# Altium PCB CamBoard.PcbDoc
Units mil, origin at the board's own origin, x right, y up, seen from the top; angles counter-clockwise.
Board outline 4547.44 x 2454.85 mil, 2 copper layers (Top Layer, Bottom Layer); 13 components, 15 nets, 97 pads, 23 vias.
Unrouted connection lines stored in the file: 2.
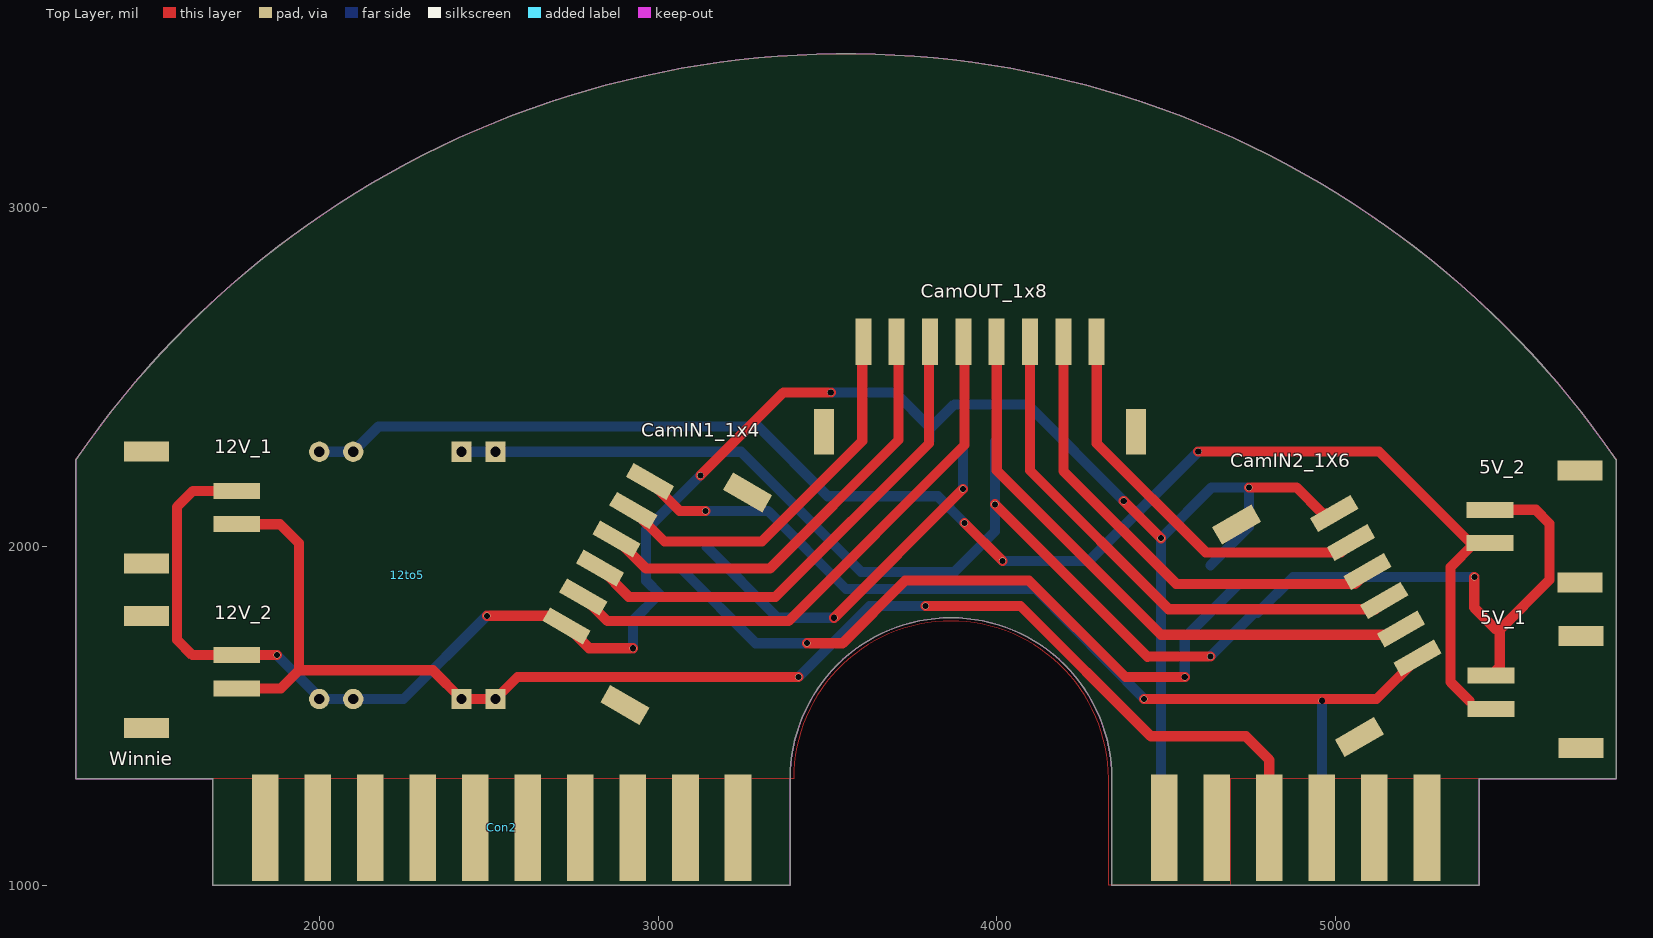
[diagram p0: Top Layer view]
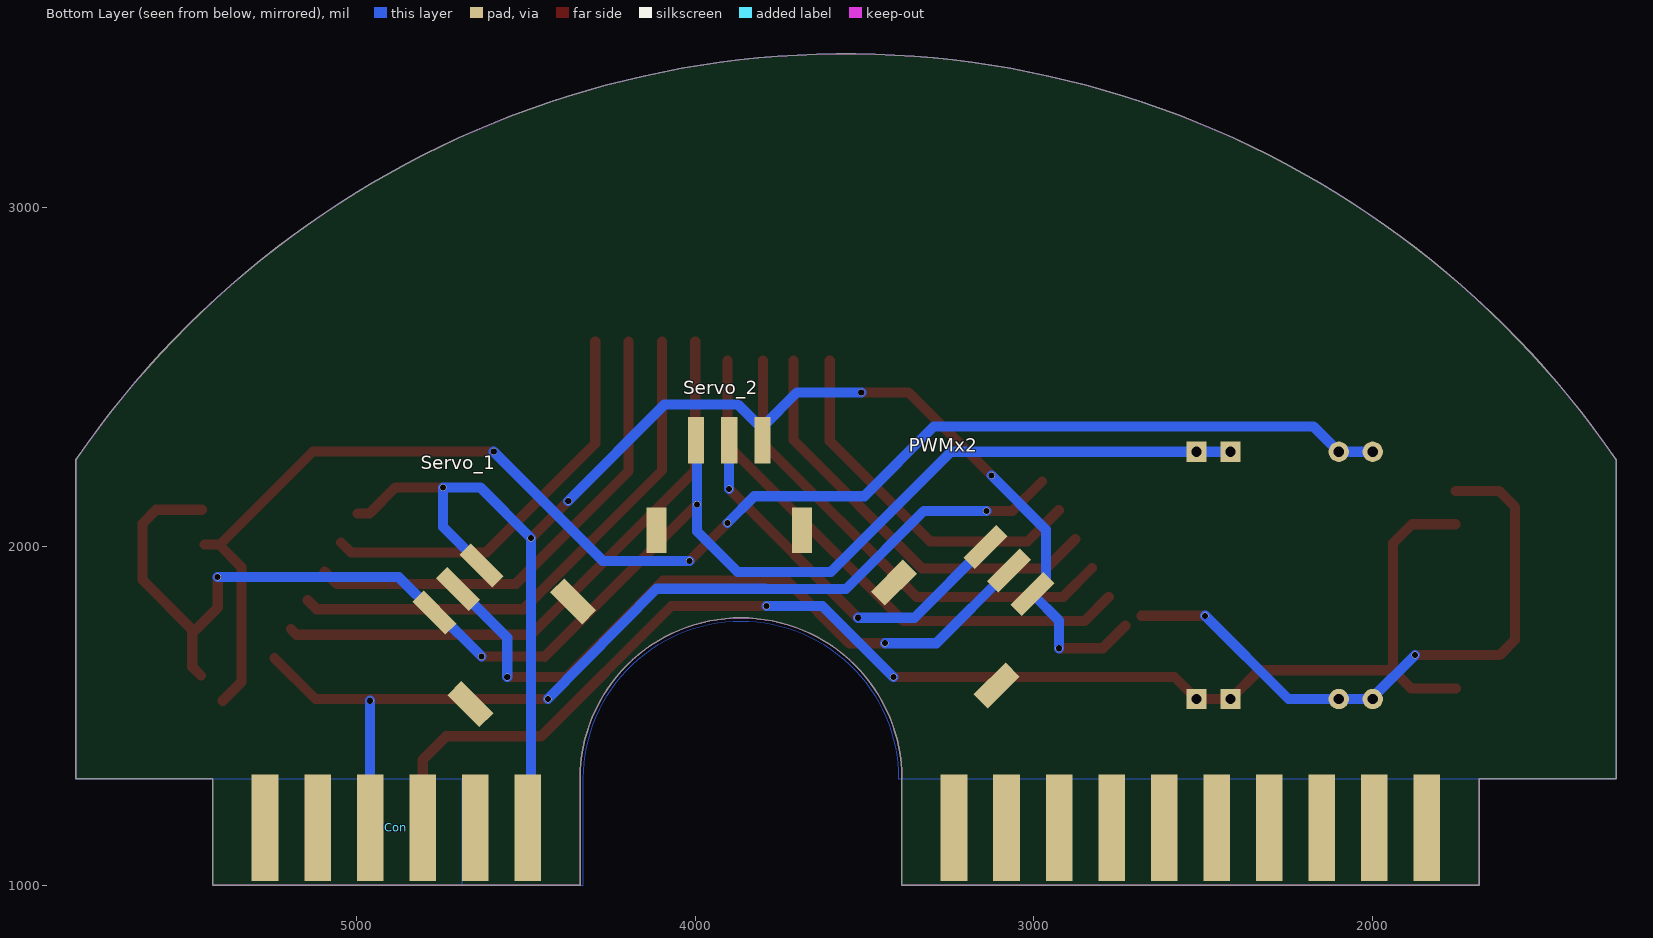
[diagram p1: Bottom Layer view, seen from below]

## Layer stack, top to bottom
Top Solder: solder mask 0.4, Solder Resist, Dk 3.5
Top Layer: signal copper 1.4
Dielectric 1: dielectric 12.6, FR-4, Dk 4.8
Bottom Layer: signal copper 1.4
Bottom Solder: solder mask 0.4, Solder Resist, Dk 3.5

## Board outline
1281.3,1315 1281.3,2256.37 1281.27,2256.39 cw(c3555,699.09) 5828.71,2256.42 5828.7,2256.41 5828.7,1315 5425,1315 5425,1000 4340,1000 4340,1315 ccw(c3865,1315) 3865,1790 ccw(c3865,1315) 3390,1315 3390,1000 1685,1000 1685,1315

## Design rules (kind name [scope] priority, off if disabled: settings)
Clearance [All] p1: gap=8 ignorepadtopadclearanceinfootprint=FALSE
PolygonConnect GND [InPadClass('GND')] p1: connectstyle=Direct reliefconductorwidth=10 reliefentries=4 polygonreliefangle="90 Angle" airgapwidth=10
PolygonConnect [All] p2: connectstyle=Relief reliefconductorwidth=10 reliefentries=4 polygonreliefangle="90 Angle" airgapwidth=10
RoutingVias [All] p1: holewidth=28 width=50 viastyle="Through Hole" minholewidth=28 minwidth=50 maxholewidth=28 maxwidth=50
SolderMaskExpansion [All] p1: expansion=4
Width [All] p1: maxlimit=100 minlimit=20 preferedwidth=30 minimp=50.000000 maximp=50.000000 favimp=50.000000
30 further rules are at their usual default settings.

## Components (designator, comment, footprint, x,y, rotation, side; value= is the part's Value field where it differs from the comment)
5V_1 "XHconnector_1x2" XH1x2 5537.99,1540.83 r270 top
5V_2 "XHconnector_1x2" XH1x2 5535,2030 r270 top
12to5 "VoltageConverter" converter 2260,1915 r90 top
12V_1 "XHconnector_1x2" XH1x2 1677.01,2144.88 r90 top
12V_2 "XHconnector_1x2" XH1x2 1677.01,1660 r90 top
CamIN1_1x4 "XHconnector_1x6" XH1x6 3005,2085 r240 top
CamIN2_1X6 "XHconnector_1x6" XH1x6 5135,1700 r120 top
CamOUT_1x8 "XHconnector_1x8" XH1x8 4216.54,2526.26 r180 top
Con "2x6pin" 2X6PIN 4882.32,1170 r180 bottom
Con2 "2x10pin" 2X10PIN 2538.03,1170 r0 top locked
PWMx2 "PWMx2" XH1x3 3115.57,1860.04 r45 bottom
Servo_1 "Servo" XH1x3 4630.81,1832.84 r315 bottom
Servo_2 "Servo" XH1x3 3880,2235 r0 bottom

## Footprints (in the part's own frame and the unit in brackets; to place one, negate y for a bottom-side part, rotate by r counter-clockwise, add the part's x,y. Pads: shape width x height; smd on the part's side, far side on the other; paste and mask are expansions set on the pad)
2X6PIN [mm]
  rect 2x8 smd far side: 1(-9.85,0) 2(-5.91,0) 3(-1.97,0) 4(1.97,0) 5(5.91,0) 6(9.85,0)
  rect 2x8 smd: 1(-9.85,0) 2(-5.91,0) 3(-1.97,0) 4(1.97,0) 5(5.91,0) 6(9.85,0)
2X10PIN [mm]
  rect 2x8 smd far side: 1(17.73,0) 3(13.79,0) 5(9.85,0) 7(5.91,0) 9(1.97,0) 11(-1.97,0) 13(-5.91,0) 15(-9.85,0) 17(-13.79,0) 19(-17.73,0)
  rect 2x8 smd: 2(17.73,0) 4(13.79,0) 6(9.85,0) 8(5.91,0) 10(1.97,0) 12(-1.97,0) 14(-5.91,0) 16(-9.85,0) 18(-13.79,0) 20(-17.73,0)
converter [mil]
  round 60 hole 30: 1(-365,260) 2(-365,160) 7(365,160) 8(365,260)
  rect 60x60 hole 30: 3(-365,-160) 4(-365,-260) 5(365,-260) 6(365,-160)
XH1x2 [mm]
  rect 1.2x3.5 smd: 1(-2,-2) 2(0.5,-2)
  rect 1.5x3.4 smd: 3(-4.95,4.75) 4(3.45,4.75)
XH1x3 [mm]
  rect 1.2x3.5 smd: 1(-2,-2) 2(0.5,-2) 3(3,-2)
  rect 1.5x3.4 smd: 4(-4.95,4.75) 5(5.95,4.75)
XH1x6 [mm]
  rect 1.2x3.5 smd: 1(-2,-2) 2(0.5,-2) 3(3,-2) 4(5.5,-2) 5(8,-2) 6(10.5,-2)
  rect 1.5x3.4 smd: 7(-4.95,4.75) 8(13.45,4.75)
XH1x8 [mm]
  rect 1.2x3.5 smd: 1(-2,-2) 2(0.5,-2) 3(3,-2) 4(5.5,-2) 5(8,-2) 6(10.5,-2) 7(13,-2) 8(15.5,-2)
  rect 1.5x3.4 smd: 9(-4.95,4.75) 10(18.45,4.75)

## Via types
v1: diameter 20, hole 18, Top Layer to Bottom Layer, tented both sides, 23 vias

## Nets (pads, with @x,y where several pads share a name; then routed paths per layer and width w, separated by ;. In a path a pad name is that pad's centre, name@x,y a point inside that pad or via, vN(x,y) a via of type N, cw(c..) or ccw(c..) an arc to the next point about the centre after c; other vN are vias at no path point)
5V: CamIN1_1x4.1 CamIN2_1X6.1 Con.3 | length 2966.9
  Top Layer w30: CamIN1_1x4.1 3063.74,2105 v1(3140,2105) ; v1(4435,1550) 4965,1550 5121.38,1550 CamIN2_1X6.1 ; Con.3@4959.76,1170 Con.3@4965,1175.24
  Bottom Layer w30: v1(3140,2105) 3325,2105 3554.94,1875.06 3793.8,1875.06 3794.31,1875.57 4114.43,1875.57 v1(4435,1550) ; Con.3@4959.88,1170 v1(4959.88,1544.88)
12V: 12to5.3 12to5.4 12V_1.1 12V_2.1 Con.4 | length 4193.5
  Top Layer w30: 12V_2.1@1753.74,1581.26 12V_2.1 1886.26,1581.26 1940,1635 ; 12V_1.1 1883.86,2066.14 1940,2010 1940,1635 ; v1(3415,1615) 2585,1615 12to5.4 12to5.3 2335,1635 1940,1635 ; v1(3790,1825) 4070,1825 4455,1440 4735,1440 4804.65,1370.35 Con.4@4804.65,1170
  Bottom Layer w30: v1(3415,1615) 3625,1825 v1(3790,1825)
GND: 12to5.1 12to5.2 12V_1.2 12V_2.2 CamIN1_1x4.6 CamIN2_1X6.6 Con.6 PWMx2.1 Servo_1.1 Servo_2.1 | length 6307.9
  Top Layer w30: 12V_1.2 1627.24,2164.57 1580,2117.32 1580,1725 1625.32,1679.68 12V_2.2 v1(1875,1679.68) ; v1(2495,1795.83) CamIN1_1x4.6@2682.31,1795.83 ; CamIN1_1x4.6 2796.48,1700 v1(2925.83,1700) ; v1(3125,2210) 3370,2455 v1(3510,2455) ; v1(4375,2135) v1(4485,2025) ; v1(4745,2175) 4885,2175 4962.63,2097.37 CamIN2_1X6.6
  Bottom Layer w30: v1(1875,1679.68) 12to5.1@2002.34,1552.34 ; 12to5.1 12to5.2 2248.35,1550 2494.17,1795.83 v1(2495,1795.83) ; v1(2925.83,1700) 2925.83,1781.65 PWMx2.1 2965,1899.25 2965,2050 v1(3125,2210) ; v1(3510,2455) 3700,2455 3801.26,2353.74 Servo_2.1@3801.26,2346.26 ; Servo_2.1 Servo_2.1@3801.26,2346.26 ; v1(4375,2135) 4090,2420 3875,2420 Servo_2.1@3801.26,2346.26 ; Con.6@4492.2,1182.2 Con.6@4499.41,1175 ; Con.6@4503.29,1070.11 4485,1088.39 v1(4485,2025) 4635,2175 v1(4745,2175) 4745,2058.39 Servo_1.1
NetPWMx2_2: PWMx2.2 Servo_1.2 | length 2100.2
  Top Layer w30: v1(3440,1715) 3545,1715 3730,1900 4095,1900 4380,1615 v1(4555,1615)
  Bottom Layer w30: PWMx2.2 3288.44,1715 v1(3440,1715) ; v1(4555,1615) 4555,1730.83 Servo_1.2@4710.26,1886.09
NetPWMx2_3: PWMx2.3 Servo_2.2 | length 1120.7
  Top Layer w30: v1(3520,1790) v1(3900,2170)
  Bottom Layer w30: PWMx2.3 3352.64,1790 v1(3520,1790) ; v1(3900,2170) Servo_2.2@3900,2290
S1: CamIN1_1x4.2 CamOUT_1x8.8 | length 1075.6
  Top Layer w30: CamIN1_1x4.2 3019.29,2015 3306.46,2015 3603.15,2311.69 CamOUT_1x8.8@3603.15,2550
S2: CamIN1_1x4.3 CamOUT_1x8.7 | length 1260.7
  Top Layer w30: CamIN1_1x4.3 2964.84,1935 3330,1935 3710,2315 CamOUT_1x8.7@3710,2550
S3: CamIN1_1x4.4 CamOUT_1x8.6 | length 1439.7
  Top Layer w30: CamIN1_1x4.4 2913.78,1851.61 3346.88,1851.61 3800,2304.72 CamOUT_1x8.6@3800,2550
S4: CamIN1_1x4.5 CamOUT_1x8.5 | length 1620.7
  Top Layer w30: CamIN1_1x4.5 2850.93,1780 3385,1780 3905,2300 CamOUT_1x8.5@3905,2550
S5: CamIN2_1X6.2 CamOUT_1x8.4 | length 1781
  Top Layer w30: CamOUT_1x8.4 4000,2225 4485,1740 5176.93,1740 CamIN2_1X6.2
S6: CamIN2_1X6.3 CamOUT_1x8.3 | length 1606.8
  Top Layer w30: CamOUT_1x8.3 4098.43,2224.64 4508.06,1815 5117.48,1815 CamIN2_1X6.3
S7: CamIN2_1X6.4 CamOUT_1x8.2 | length 1433.2
  Top Layer w30: CamOUT_1x8.2 4196.85,2223.15 4530,1890 5058.03,1890 CamIN2_1X6.4
S8: CamIN2_1X6.5 CamOUT_1x8.1 | length 1196
  Top Layer w30: CamOUT_1x8.1 4295.28,2304.72 4616.96,1983.04 5016.62,1983.04 CamIN2_1X6.5
VOUT+: 5V_1.1 5V_2.1 12to5.5 12to5.6 Servo_1.3 Servo_2.3 | length 4645.1
  Top Layer w30: v1(3995,2125) 4445,1675 4445.6,1675.6 v1(4630.81,1675.6) ; v1(5410,1910) 5410,1820 5475,1755 5485,1755 ; 5V_2.1 5591.26,2108.74 5632.08,2067.92 5632.08,1902.08 5485,1755 ; 5V_1.1 5485,1645.32 5485,1755
  Bottom Layer w30: 12to5.6 12to5.5 3245,2280 3600,1925 3875,1925 3995,2045 v1(3995,2125) 3995,2310.63 Servo_2.3 ; v1(4630.81,1675.6) 4760.2,1805 Servo_1.3 4875,1910 v1(5410,1910)
VOUT-: 5V_1.2 5V_2.2 12to5.7 12to5.8 | length 4403.6
  Top Layer w30: v1(3905,2070) v1(4016.94,1958.06) ; v1(4595,2280.71) 5128.64,2280.71 5403.21,2006.14 5V_2.2@5406.14,2006.14 ; 5395,1545 5340,1600 5340,1940 5V_2.2@5406.14,2006.14 ; 5V_2.2@5449.25,2006.14 5V_2.2@5406.14,2006.14
  Bottom Layer w30: 12to5.8 12to5.7 2175,2355 3295,2355 3501.27,2148.73 3826.27,2148.73 v1(3905,2070) ; v1(4016.94,1958.06) 4273.06,1958.06 v1@4595.35,2280.35
pads on no net: 5V_1.3 5V_1.4 5V_2.3 5V_2.4 12V_1.3 12V_1.4 12V_2.3 12V_2.4 CamIN1_1x4.7 CamIN1_1x4.8 CamIN2_1X6.7 CamIN2_1X6.8 CamOUT_1x8.9 CamOUT_1x8.10 Con2.1 Con2.2 Con2.3 Con2.4 Con2.5 Con2.6 Con2.7 Con2.8 Con2.9 Con2.10 Con2.11 Con2.12 Con2.13 Con2.14 Con2.15 Con2.16 Con2.17 Con2.18 Con2.19 Con2.20 Con.1 Con.2 Con.5 PWMx2.4 PWMx2.5 Servo_1.4 Servo_1.5 Servo_2.4 Servo_2.5

## Polygon pours and split planes (outlines as drawn)
GND on Top Layer "Top Layer-No Net" (solid, shelved, pour order 0): 1675,1315 1281.3,1315 1281.3,2256.37 cw(c3555.02,699.09) 5828.71,2256.42 5828.7,1315 4690,1315 4690,1000 4330,1000 4330,1315 ccw(c3865,1315) 3865,1780 ccw(c3865,1315) 3400,1315
GND on Bottom Layer "Bottom Layer-No Net" (solid, shelved, pour order 2): 1675,1315 1281.3,1315 1281.3,2256.37 cw(c3555.02,699.09) 5828.71,2256.42 5828.7,1315 4690,1315 4690,1000 4330,1000 4330,1315 ccw(c3865,1315) 3865,1780 ccw(c3865,1315) 3400,1315

## Keep-outs
Keep-Out Layer:
  the board outline again, w1

## Silkscreen, mask and mechanical layers (free items; w line width, h text height)
Top Overlay:
  text "Winnie" at 1380,1355 h40
Top Solder:
  drawing of 5418 lines, arcs and shapes, not listed